# Altium PCB TIDA_010057.PcbDoc (part 6 of 9)
Units mil, origin at the board's own origin, x right, y up, seen from the top; angles counter-clockwise.
Board outline 1771.65 x 3543.31 mil, 12 copper layers (Top Layer, GND1, Signal Layer 1, GND2, POWER1, POWER2, GND4, POWER3, GND6, Signal Layer 2, GND7, Bottom Layer), stack 62.79 mil thick; 593 components, 374 nets, 1805 pads, 1029 vias.
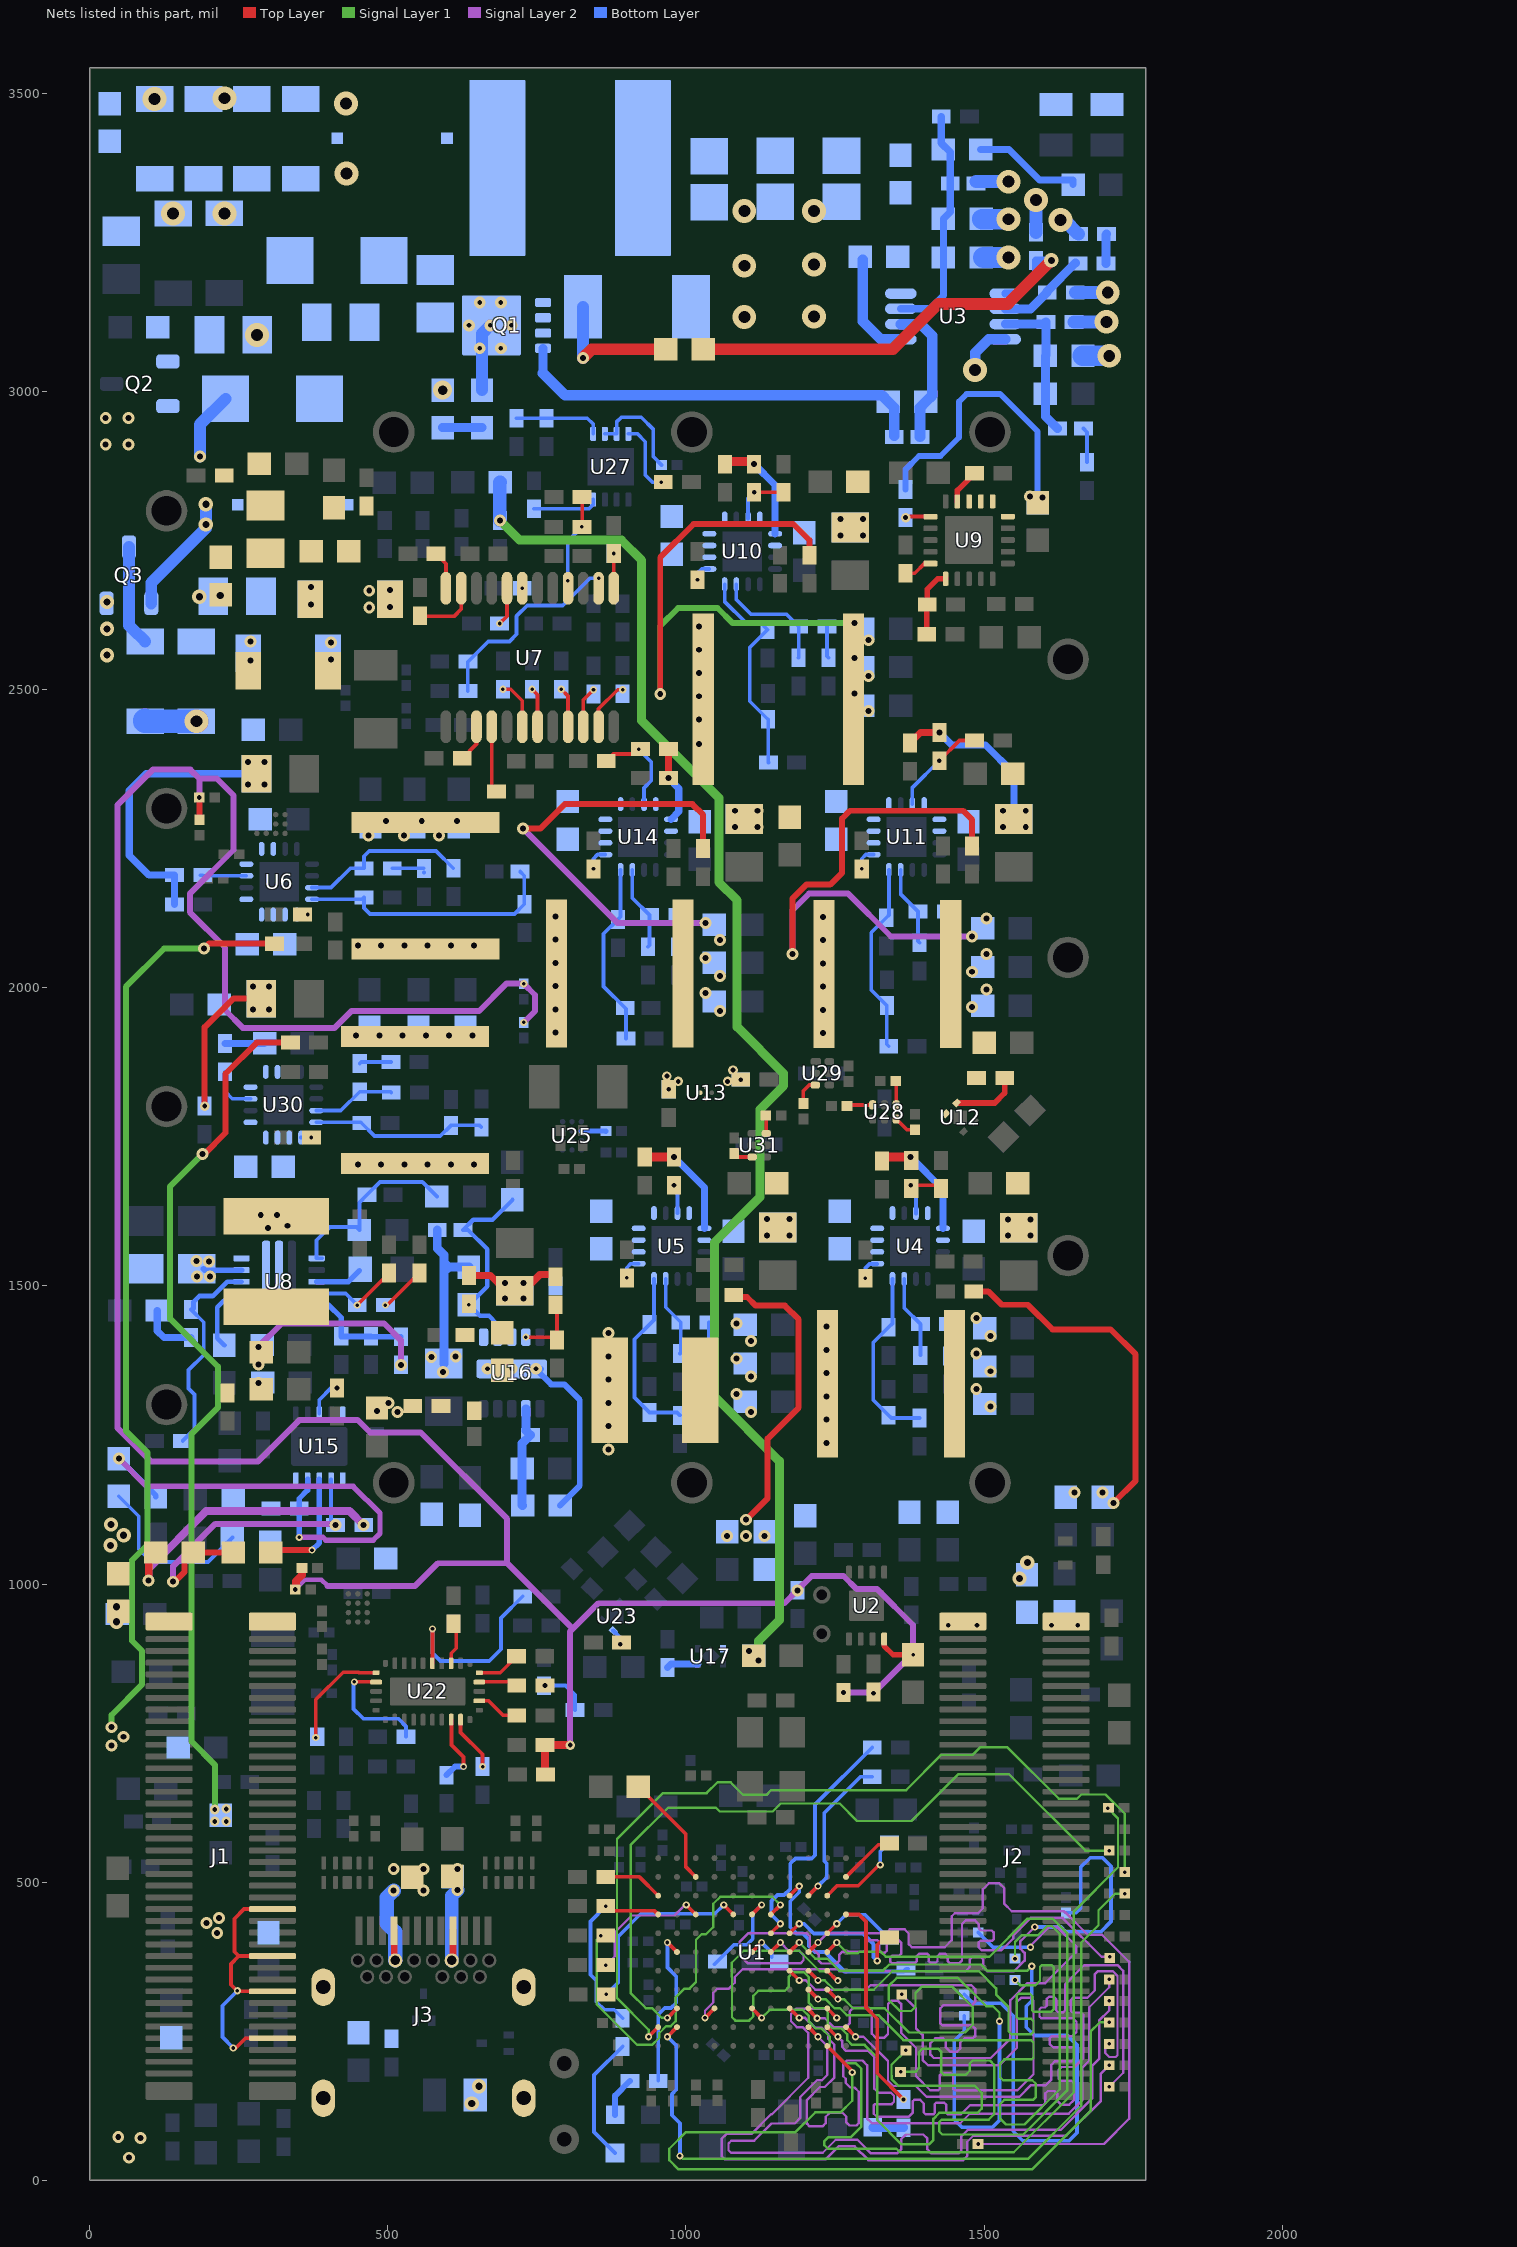
[diagram p14: the nets of this part, all layers, seen from the top]

## Via types
v1: diameter 12, hole 6, Top Layer to Bottom Layer, tented both sides, 424 vias
v2: diameter 20, hole 10, Top Layer to Bottom Layer, tented both sides, 401 vias
v3: diameter 16, hole 8, Top Layer to Bottom Layer, tented both sides, 96 vias
v4: diameter 24, hole 12, Top Layer to Bottom Layer, tented both sides, 28 vias
v5: diameter 20, hole 10, Top Layer to Bottom Layer, 28 vias
v6: diameter 40, hole 20, Top Layer to Bottom Layer, tented both sides, 23 vias
v7: diameter 19.68, hole 7.87, Top Layer to Bottom Layer, 17 vias
v8: diameter 19.68, hole 7.87, Top Layer to Bottom Layer, tented both sides, 10 vias
v9: diameter 32, hole 16, Top Layer to Bottom Layer, tented both sides, 1 vias
v10: diameter 13, hole 6, Top Layer to Bottom Layer, tented both sides, 1 vias

## Nets (pads, with @x,y where several pads share a name; then routed paths per layer and width w, separated by ;. In a path a pad name is that pad's centre, name@x,y a point inside that pad or via, vN(x,y) a via of type N, cw(c..) or ccw(c..) an arc to the next point about the centre after c; other vN are vias at no path point) (continued)
HVGND: C22.2 C23.2 C24.2 C26.1 C30.2 C31.2 C32.2 C33.2 C34.2 C36.1 C37.1 C42.2 C70.2 C71.1 C72.2 C161.2 C177.2 C200.2 C201.2 C208.1 C214.1 C232.2 C233.1 C241.2 C244.2 D5.2 D6.1 L3.1 L29.1 L44.1 R37.1 R39.1 R40.1 R41.1 R44.2 R45.1 R126.2 U3.4 U3.5 | length 859.7
  Bottom Layer w17.72: C26.1@1296.51,3221 1296.51,3117.99 1326.89,3087.61 U3.5@1360.41,3087.61 ; v6(1485,3036) 1485.41,3036.41 1485.41,3064.98 1508.05,3087.61 U3.4@1535.61,3087.61
  Bottom Layer w20: v2(185,2891) 185,2944.74 D6.1@228.26,2988
  Bottom Layer w22: D5.2@1486.68,3352 v6(1541,3352) ; C32.2@1587,3267.24 v6(1587,3321.56) ; v6(1628,3288) 1634.38,3288 R40.1@1658.38,3264 ; C33.2@1651.13,3117 v6(1705.45,3117) ; C177.2@1653.13,3166 v6(1707.45,3166)
  Bottom Layer w30: C42.2@1494.99,3290 C42.2@1495.99,3289
  Bottom Layer w35: C42.2@1496.99,3289 v6(1541,3289) ; R39.1@1498.99,3225 v6(1541,3225) ; R45.1@1666,3060 v6(1710.01,3060)
  Bottom Layer w40: C208.1@93,2447.07 C208.1@94.07,2447.07 ; C208.1@93,2448.14 C208.1@94.07,2447.07 ; v6(179,2447.07) C208.1@94.07,2447.07
  other v2: 405,2551 405,2579 469,2638 504,2639 469,2666 504,2667
  other v4: 641,129 653,158
  other v6: 281,3095 1098,3125 1215,3126 1098,3211 1215,3213 140,3298.86 226,3298.93 1098,3303 1215,3303 431,3366 430,3483 109,3490.93 226,3491.93
  other v9: 592,3002.5
HVM: C38.2 J1.79 J1.80 L43.2
  other v4: 45,937 45,962
HVP: C29.1 J2.79 J2.80 L42.2
  other v3: 1440,931 1488,931 1613,931 1657,931
I2C_1V8: C5.1 C123.2 L35.2 R12.2 R13.2 R177.1 R178.1 R185.2 R186.2 R232.2 R233.2 R236.2 R237.2 U2.8 | length 5007.6
  Top Layer w9: U2.8@1332.53,907.9 1332.53,896.47 1347.5,881.5 v1(1381,881.5)
  Top Layer w10: R185.2@184,2281.99 v3(184.02,2319)
  Top Layer w13: v3(345,991) 346,992 346,1005 356.02,1015.02 R236.2@356.02,1027 ; R178.1@764.62,681 763.62,682 R177.1@763.62,730 v3(806,730)
  Signal Layer 2 w8: v3(345,991) 361.2,1007.2 388.8,1007.2 399,997
  Signal Layer 2 w10: v3(184.02,2319) 184.02,2350.98 ; 399,997 546,997 584,1035 700.14,1035 ; v1(728,1941.98) 747,1960.98 747,1987.99 v1(728,2006.99) 698.99,2006.99 653,1961 439,1961 411,1933 256.8,1933 227,1962.8 227,2068 168,2127 168,2158 241.2,2231.2 241.2,2322.8 213.02,2350.98 184.02,2350.98 ; v3(806,730) 806,920.78 810.18,924.96 ; v3(1264.5,818.38) 1313.12,818.38 v3(1314.5,817) 1379,881.5 v1(1381,881.5) 1381,931.35 1320.85,991.5 1286.58,991.5 1264.37,1013.7 1211.08,1013.7 v2(1187,989.62) 1165.29,967.91 853.12,967.91 810.18,924.96 ; 184.02,2350.98 169,2366 106,2366 46.41,2306.41 46.41,1262.26 103.35,1205.33 282.01,1205.33 352.25,1275.56 449.2,1275.56 470.19,1254.58 555.03,1254.58 700.14,1109.46 700.14,1035 ; 700.14,1035 810.18,924.96
INT#: R238.2 U22.23 | length 121.9
  Top Layer w6.25: U22.23@606.37,772.76 606.95,772.18 606.95,730.05 627,710 v1(627,694)
  Bottom Layer w10: R238.2@598.31,679.63 612.68,694 v1(627,694)
NetC4_1: C4.1 U1.E10 | length 133.2
  Top Layer w6.25: U1.E10@1236.98,414.5 v1(1253,430.51)
  Bottom Layer w6.25: v1(1253,430.51) 1268,445.51 1300.49,445.51 1339,407 C4.1@1341.38,407
NetC22_1: C22.1 C23.1 C24.1 L1.1 R33.2 R54.2 R71.2
NetC25_1: C25.1 D3.2 L3.2
NetC25_2: C25.2 C35.2 L1.2 Q1.5 Q1.6 Q1.7 Q1.8 Q1.9 R35.2 | length 114.3
  Bottom Layer w20: R35.2@658,3002.5 658,3097.07 v7(671.93,3111)
  other v7: 654.12,3072.61 689.75,3072.61 636.3,3111 707.56,3111 654.12,3149.39 689.75,3149.39
NetC26_2: C26.2 R33.1 U3.8
NetC27_1: C27.1 C177.1 U3.2 | length 150.8
  Bottom Layer w15: U3.2@1535.61,3138.8 1578.32,3138.8 1605.52,3166 C177.1@1605.88,3166 1605.88,3168.13 C27.1@1653.38,3215.62
NetC27_2: C27.2 R40.2 | length 49.4
  Bottom Layer w15: C27.2@1704.62,3215 1704.62,3263 R40.2@1705.62,3264
NetC28_2: C28.2 R36.1 | length 184
  Bottom Layer w12: R36.1@1494.5,3406 1542,3406 1593.24,3354.76 1649.5,3354.76 C28.2@1649.5,3347
NetC30_1: C30.1 C31.1 C70.1 C232.1 D3.1 L2.1 R37.2
NetC32_1: C32.1 R38.1 U3.1 | length 760.9
  Top Layer w20: R38.1@1029.5,3071 1347.15,3071 1423.15,3147 1540,3147 v4(1613,3220)
  Bottom Layer w13: U3.1@1535.61,3164.39 1557.39,3164.39 1587,3194 C32.1@1587,3220 v4(1613,3220)
NetC33_1: C33.1 D18.1 R42.1 R45.2 U3.3 | length 257.6
  Bottom Layer w15: U3.3@1535.61,3113.2 1600.09,3113.2 C33.1@1603.88,3117 1603.88,3060.87 R45.2@1603.01,3060 R42.1@1603.01,2996.39 1603.01,2958.34 D18.1@1623.35,2938
NetC34_1: C34.1 R35.1 | length 66
  Bottom Layer w15: C34.1@592,2939.5 R35.1@658,2939.5
NetC35_1: C35.1 D6.2 L4.2
NetC36_2: C36.2 C37.2 C71.2 C233.2 L4.1 L5.1 R44.1
  other v2: 270,2549 270,2581 371,2643 371,2672
NetC39_1: C39.1 U4.13
NetC39_2: C39.2 L6.1 U4.10 U4.11 U4.12
  other v2: 1236,1237 1236,1276 1236,1315 1236,1354 1236,1393 1236,1432
NetC41_1: C41.1 C43.1 C44.1 R46.1 R48.1 R49.1 U4.1 U4.2 U4.16 | length 191
  Top Layer w15: R46.1@1328,1716.13 v2(1377,1716.13)
  Bottom Layer w12: v2(1377,1716.13) 1431.12,1662.01 U4.1@1431.12,1596.53
  other v2: 1540,1584.5 1578,1584.5 1540,1611.5 1578,1611.5
NetC42_1: C42.1 D5.1 R36.2 R39.2 R245.2 U3.7 | length 391.7
  Bottom Layer w12: U3.7@1360.41,3138.8 1409.8,3138.8 1432,3161 R39.2@1432,3225 C42.1@1432,3290 1443.37,3301.37 1443.37,3401.63 1428.38,3416.62 R245.2@1428.38,3461
NetC45_1: C45.1 U4.9 | length 39.8
  Bottom Layer w6.25: v1(1301,1513) 1301,1530 1307.98,1536.98 U4.9@1320.88,1536.98
NetC46_1: C46.1 C47.1 C48.1 L6.2 L7.1 L8.1 L9.1 L10.1 R50.2 | length 580
  Top Layer w10: R50.2@1482.62,1491 1507,1491 1529.5,1468.5 1573.5,1468.5 1615,1427 1712.43,1427 1754.2,1385.23 1754.2,1173.2 v2(1717,1136)
  other v2: 1652,1154 1699,1154 1511,1298 1487,1327 1511,1357 1487,1387 1511,1416 1487,1446
NetC50_1: C50.1 R52.2 U4.7 | length 139.7
  Bottom Layer w6.25: U4.7@1366.16,1511.88 1366.16,1463.22 R52.2@1393.38,1436 1393.38,1384 C50.1@1393,1383.62
NetC51_1: C51.1 R52.1 | length 54.4
  Bottom Layer w6.25: R52.1@1440.62,1436 1443,1433.62 C51.1@1443,1382.62
NetC54_1: C54.1 U5.13
NetC54_2: C54.2 L17.1 U5.10 U5.11 U5.12
  other v2: 870.51,1226 870.51,1265 870.51,1304 870.51,1343 870.51,1382 870.51,1421
NetC56_1: C56.1 C57.1 C58.1 R53.1 R55.1 R56.1 U5.1 U5.2 U5.16 | length 189.8
  Top Layer w15: R53.1@931,1716.13 v2(980,1716.13)
  Bottom Layer w12: v2(980,1716.13) 1031.12,1665.01 U5.1@1031.12,1596.53
  other v2: 1136,1585 1174,1585 1136,1612 1174,1612
NetC59_1: C59.1 U6.13
NetC59_2: C59.2 L11.1 U6.10 U6.11 U6.12
  other v2: 450,2071 489,2071 528,2071 567,2071 606,2071 645,2071
NetC60_2: C60.2 D14.1 R119.1 U6.8 | length 443.7
  Bottom Layer w6.25: U6.8@373.12,2148.47 457.02,2148.47 R119.1@460.32,2151.77 460.32,2133.68 470,2124 712.76,2124 C60.2@729,2140.24 729,2188 D14.1@722,2195
NetC61_1: C61.1 C67.1 C68.1 L11.2 L30.2 R74.2 | length 1575
  Top Layer w10: v2(192,2066) 200,2074 R74.2@310,2074
  Signal Layer 1 w10: v2(37,760) 37,780.57 88.2,831.77 88.2,887.8 71,905 71,1040 97,1066 97,1221 60.8,1257.2 60.8,2001.8 125,2066 v2(192,2066)
  other v2: 37,729 57,744 468,2255.5 527,2255.5 586,2255.5 497,2279.5 557,2279.5 616,2279.5
NetC62_1: C62.1 C63.1 C64.1 R66.1 R69.1 R72.1 U6.1 U6.2 U6.16 | length 472.7
  Bottom Layer w12: R66.1@142.38,2140 R69.1@142.38,2189 99.65,2189 66.49,2222.16 66.49,2331.15 94.35,2359 C63.1@280,2359
  other v2: 266,2341 293,2341 266,2379 293,2379
NetC65_2: C65.2 D15.1 R132.1 U30.8 | length 295
  Bottom Layer w6.25: U30.8@380.12,1774.47 454.91,1774.47 R132.1@456.38,1773 477.81,1751.56 588.22,1751.56 D15.1@606,1769.35 654.03,1769.35 C65.2@657,1766.38
NetC66_1: C66.1 U6.9 | length 18.5
  Bottom Layer w6.25: U6.9@347.53,2122.88 365.88,2122.88 v1(366,2123)
NetC69_2: C69.2 D16.1 R100.1 U10.8 | length 369.1
  Bottom Layer w6.25: U10.8@1064.98,2676.88 1064.98,2648.02 1100,2613 1124.62,2613 R100.1@1137,2600.62 1107,2570.62 1107,2480.5 1137.15,2450.35 D16.1@1138,2450.35 1138,2378.38 C69.2@1138.38,2378
NetC72_1: C72.1 Q3.1 R201.2 | length 204.2
  Bottom Layer w20: Q3.1@103.4,2644.76 103.4,2679.4 195,2771 v4(195,2811)
  other v4: 195,2777
NetC75_1: C75.1 R121.2 U6.7 | length 286.3
  Bottom Layer w6.25: U6.7@373.12,2168.16 404.9,2168.16 437.12,2200.38 R121.2@460.32,2200.38 460.32,2220.82 469,2229.5 581,2229.5 C75.1@610,2200.5
NetC76_1: C76.1 R121.1 | length 53.2
  Bottom Layer w6.25: R121.1@507.57,2200.38 C76.1@560.24,2200.38 ; C76.1@560.62,2193.38 C76.1@561,2193
NetC77_1: C77.1 R68.2 U27.1 | length 148.9
  Bottom Layer w6.25: R68.2@716,2955.24 C77.1@766,2955.24 834.76,2955.24 844.47,2945.53 U27.1@844.47,2929.12
NetC78_1: C78.1 U27.2 U27.3 | length 178
  Bottom Layer w6.25: U27.2@864.16,2929.12 U27.3@883.84,2929.12 883.84,2948.84 892,2957 925,2957 945.45,2936.55 945.45,2890.56 C78.1@959.01,2877
NetC79_1: C79.1 U30.13
NetC79_2: C79.2 L27.1 U30.10 U30.11 U30.12
  other v2: 450,1704 489,1704 528,1704 567,1704 606,1704 645,1704
NetC80_1: C80.1 U10.13
NetC80_2: C80.2 L13.1 U10.10 U10.11 U10.12
  other v2: 1022,2409 1021.8,2450 1021.8,2489 1021.8,2528 1021.8,2567 1021.8,2606
NetC81_1: C81.1 C82.1 C86.1 R91.1 R94.1 R96.1 U10.1 U10.2 U10.16 | length 180.3
  Top Layer w15: R91.1@1065.5,2883 R94.1@1114.5,2883
  Bottom Layer w12: v2(1114.5,2878.24) 1149.62,2843.12 U10.1@1149.62,2761.53
  other v2: 1259.01,2759 1297.01,2759 1259.01,2786 1297.01,2786
NetC83_1: C83.1 C84.1 C88.1 C89.1 C90.1 L13.2 R97.2 R99.2 U9.5 U9.6 U9.7 U9.8 | length 1489.3
  Top Layer w10: v2(957,2493) 957,2722 1013,2778 1180,2778 1207,2751 R97.2@1207,2725.62
  Signal Layer 1 w10: v2(957,2493) 957,2607 987,2637 1053,2637 1078,2612 v2(1282.51,2612)
  Bottom Layer w10: R99.2@1368.5,2835.87 1368.5,2869.5 1391,2892 1427,2892 1458,2923 1458,2983 1471,2996 1527,2996 1590,2933 C83.1@1590,2813.5
  other v2: 1306.51,2464 1282.51,2494 1306.51,2523 1282.51,2553 1306.51,2583 1598,2822 1577,2824
NetC87_1: C87.1 U10.9 | length 33.9
  Bottom Layer w6.25: v1(1019.5,2684.38) 1019.5,2695.5 1026.48,2702.47 U10.9@1039.39,2702.47
NetC94_1: C94.1 U5.9 | length 39.8
  Bottom Layer w6.25: v1(901,1513.5) 901,1530.5 907.98,1537.47 U5.9@920.88,1537.47
NetC96_1: C96.1 C97.1 C98.1 L12.1 L17.2 L18.1 L23.1 L35.1 R57.2 | length 500.2
  Top Layer w10: R57.2@1080.24,1485 1080.24,1481.5 1102.5,1481.5 1117,1467 1166,1467 1189,1444 1189,1296 1137,1244 1137,1144 v2(1101,1108)
  other v2: 214,415 196,432 217,440 1069.27,1081 1101,1081 1132,1081 1109.01,1289 1085.01,1319 1109.01,1348 1085.01,1378 1109.01,1408 1085.01,1437
NetC100_1: C100.1 R59.2 U5.7 | length 136.3
  Bottom Layer w6.25: U5.7@966.16,1511.88 966.16,1464.22 R59.2@991.38,1439 991.38,1388 C100.1@990,1386.62
NetC101_1: C101.1 R59.1 | length 53.8
  Bottom Layer w6.25: R59.1@1038.62,1439 1038.62,1390 C101.1@1042,1386.62
NetC102_1: C102.1 U11.13
NetC102_2: C102.2 L24.1 U11.10 U11.11 U11.12
  other v2: 1230,1924 1230,1963 1230,2002 1230,2041 1230,2080 1230,2119
NetC103_1: C103.1 C104.1 C105.1 R62.1 R64.1 R65.1 U11.1 U11.2 U11.16 | length 286.6
  Top Layer w12: R62.1@1376,2410.62 1393.62,2428.24 v2(1425,2428.24)
  Bottom Layer w12: v2(1425,2428.24) 1445.75,2407.5 1502.49,2407.5 1550,2359.99 C104.1@1550,2283
  other v2: 1532,2270 1570,2270 1532,2297 1570,2297
NetC106_1: C106.1 U11.9 | length 39.8
  Bottom Layer w6.25: v1(1295,2199.5) 1295,2216.5 1301.98,2223.47 U11.9@1314.88,2223.47
NetC107_1: C107.1 U9.15 | length 46.3
  Top Layer w6.25: C107.1@1370.5,2695.38 1383.88,2695.38 1400.13,2711.63 U9.15@1410.04,2711.63
NetC110_1: C110.1 C111.1 C113.1 C224.1 L24.2 R104.2 R113.2 U12.4 | length 974.1
  Top Layer w10: v2(1179,2057) 1179,2150 1202,2173 1242,2173 1262,2193 1262,2284 1275,2297 1465,2297 1480,2282 R104.2@1480,2238
  Signal Layer 2 w10: v2(1179,2057) 1179,2130.52 1206.48,2158 1272,2158 1344,2086 v2(1480.01,2086)
  other v2: 1480.01,1968 1504.01,1997 1480.01,2027 1504.01,2057 1504.01,2116
NetC114_1: C114.1 R107.2 U11.7 | length 135.4
  Bottom Layer w6.25: U11.7@1360.16,2197.88 1360.16,2157.22 R107.2@1389.38,2128 1389.38,2078.24 C114.1@1392,2075.62
NetC116_1: C116.1 L19.2 U8.7@317.67,1507
  other v2: 299,1597 332,1601 287,1619 314,1619
NetC116_2: C116.2 U8.13
NetC117_1: C117.1 C118.1 L19.1 R134.1 R135.2 U8.12 | length 166.1
  Bottom Layer w6.25: R135.2@170,1413.38 R135.2@174.17,1409.21
  Bottom Layer w9.4: C117.1@191,1529 193.32,1526.68 U8.12@254.68,1526.68
  Bottom Layer w12: R134.1@113.5,1459 113.5,1424.5 124.62,1413.38 R135.2@170,1413.38
  other v2: 180,1516 202,1516 200,1541 179,1542
NetC119_1: C119.1 U8.10 | length 118.8
  Bottom Layer w8: C119.1@226,1400.5 214,1412.5 214,1464 237.31,1487.31 U8.10@254.68,1487.31
NetC120_1: C120.1 C134.1 C137.1 C171.1 R136.1 R138.2 U8.8@296.02,1507 | length 308
  Signal Layer 2 w10: v2(283,1398) 322,1437 494,1437 522,1409 v2(522,1367.76)
  other v2: 283,1337 283,1368
NetC121_1: C121.1 C179.2 C191.1 L28.1 R140.2 U15.10 | length 285.8
  Bottom Layer w6.25: R140.2@49,1147.5 82.52,1113.98 82.52,1058.48 104,1037 198.5,1037 C191.1@239.5,1078
NetC129_1: C129.1 J3.S1 J3.S2 J3.S3 J3.S4 L21.1
NetC130_2: C130.2 R162.1 R171.1 | length 82
  Bottom Layer w6.25: v3(763.62,830) 798,830 814,814 R162.1@814,789
NetC132_1: C132.1 C135.1 C219.1 C220.1 C221.1 L25.2 R114.2 U13.A1 U13.B1 | length 754.4
  Top Layer w10: v2(727,2266.99) 755.99,2266.99 797.12,2308.12 1010.88,2308.12 1029,2290 R114.2@1029,2233.62
  Signal Layer 2 w10: v2(727,2266.99) 884.99,2109 v2(1033.01,2109)
  other v2: 1057.01,1961 1033.01,1991 1057.01,2020 1033.01,2050 1057.01,2080
  other v3: 971.26,1830 987.26,1843.01 968.26,1852.01
NetC157_1: C157.1 C158.1 C159.1 R124.1 R127.1 R128.1 U30.1 U30.2 U30.16 | length 313.9
  Top Layer w10: v3(193,1801.62) 193,1934 241,1982 C157.1@288,1982
  Bottom Layer w10: C159.1@293.13,1906.62 C159.1@293.5,1907
  Bottom Layer w12: R127.1@227,1906.62 C159.1@293.13,1906.62
  other v2: 274,1964 301,1964 274,2002 301,2002
NetC160_1: C160.1 U30.9 | length 17.5
  Bottom Layer w6.25: U30.9@354.53,1748.88 371.88,1748.88 v1(372,1749)
NetC164_1: C164.1 C234.1 C235.1 L32.1 U17.1 | length 2403.6
  Signal Layer 1 w15: v2(688,2784) 720.65,2751.35 859.65,2751.35 860,2751 892,2751 925.9,2717.1 925.9,2448.1 1055.3,2318.7 1055.3,2177.36 1085.8,2146.86 1085.8,1934.39 1163.96,1856.23 1163.96,1835.77 1124,1795.81 1124,1649 1048,1573 1048,1315.08 1156.7,1206.38 1156.7,939.7 1122,905 v2(1122,872)
  Signal Layer 1 w20: v2(1106,888) v2(1122,872)
  Bottom Layer w23: v2(688,2784) 688,2847.5 L32.1@688.5,2848
NetC173_1: C173.1 R154.2 U7.4 | length 149.9
  Top Layer w6.25: v1(825.62,2773) 826,2773.38 R154.2@826,2823
  Bottom Layer w6.25: v1(802,2683) 802,2749.38 v1(825.62,2773)
NetC175_1: C175.1 R107.1 | length 54.2
  Bottom Layer w6.25: R107.1@1436.62,2128 1436.62,2080 C175.1@1441,2075.62
NetC176_1: C176.1 U14.13
NetC176_2: C176.2 L25.1 U14.10 U14.11 U14.12
  other v2: 781,1925 781,1964 781,2003 781,2042 781,2081 781,2120
NetC179_1: C179.1 R137.1 R140.1 U15.9 | length 845.6
  Signal Layer 2 w9: v2(49,1210.5) 95.5,1164 442,1164 487,1119 487,1085 475.7,1073.7 396,1073.7 391,1078.7 351.94,1078.7 v1(351.62,1078.38)
  Bottom Layer w9: v2(49,1210.5) 111,1148.5 R137.1@111,1146.5 ; v1@352,1078 v1(351.62,1078.38) C179.1@351.62,1127 351.62,1143.62 365.63,1157.63 U15.9@365.63,1175.76
NetC181_1: C181.1 C189.1 R242.2 U15.5
  other v2: 516,1289 482,1290 501,1304
NetC182_2: C182.2 R138.1 R142.2 U8.5 | length 181.5
  Bottom Layer w9: U8.5@380.66,1467.63 401.37,1467.63 422,1447 R142.2@422,1415.62 ; C182.2@472,1415.62 472.62,1415 R138.1@522,1415
  Bottom Layer w10: R142.2@422,1415.62 C182.2@472,1415.62
NetC183_1: C183.1 R164.2 U8.4 | length 151.9
  Top Layer w6.25: v1(448.76,1468) 502,1521.24 C183.1@502,1521.76
  Bottom Layer w6.25: U8.4@380.66,1487.32 429.44,1487.32 v1(448.76,1468)
NetC184_1: C184.1 R164.1 | length 79.3
  Top Layer w6.25: v1(496,1468) 499.24,1468 C184.1@553,1521.76
NetC186_1: C186.1 R190.1 R239.2 U16.7 | length 171.2
  Bottom Layer w15: R239.2@726.01,1132 725.5,1132.5 R190.1@725.5,1194 725.5,1236.13 C186.1@739.38,1250 731.62,1257.76 U16.7@731.62,1294.07
NetC187_1: C187.1 C188.1 C193.1 R67.2 R181.2 R188.2 R191.1 U16.3 | length 186.8
  Top Layer w12: R188.2@636,1517.62 672.38,1517.62 698,1492 C187.1@713,1492 728,1492 755,1519 777.62,1519 R191.1@781,1515.62
  Bottom Layer w12: C193.1@712,1483 723,1494 C193.1@726,1494
  other v2: 697,1479 728,1479 697,1505 728,1505
NetC188_2: C188.2 C194.2 D7.2 D8.2 R239.1 R241.1 R242.1 U16.1 U16.11@708,1361 | length 579.6
  Bottom Layer w10: U16.11@757,1361 v7(748.55,1361) 748.55,1360.45 774,1335 796,1335 822,1309 822,1165 R239.1@789,1132
  Bottom Layer w15: D8.2@583,1594 583,1563 594,1552 594,1539.5 ; C194.2@594,1370 594,1523.5 ; R241.1@636,1531.5 602,1531.5 ; 594,1523.5 594,1539.5 ; 594,1523.5 602,1531.5 ; 594,1539.5 602,1531.5
  other v2: 593,1356 573,1381 614,1382
  other v7: 667.45,1361 708,1361
NetC190_1: C190.1 R163.2 R195.2 U15.7 | length 540.3
  Top Layer w10: v2(140,1004) 143,1004 159,1020 159,1038 R195.2@174,1053 R163.2@241.01,1053
  Signal Layer 2 w10: v2(140,1004) 140,1030 211,1101 410.38,1101 v2(412.38,1099)
  Bottom Layer w6.25: U15.7@405,1175.76 405,1106.38 v2(412.38,1099)
NetC190_2: C190.2 C195.2 C207.1 L34.2 R195.1 U15.6 | length 482.5
  Top Layer w13: v2(99,1006) 99,1040.99 R195.1@111.01,1053
  Signal Layer 2 w13: v2(99,1006) 99,1026 195.7,1122.7 435.92,1122.7 v2(459.62,1099)
NetC192_2: C192.2 U15.3 | length 61.2
  Bottom Layer w6.25: U15.3@385.32,1286 385.32,1309.32 405,1329 v3(415,1329)
NetC196_1: C196.1 C197.1 C215.1 R108.1 R110.1 R112.1 U14.1 U14.2 U14.16 | length 130.8
  Top Layer w12: v2(970.66,2351.93) 970.66,2400.17 R110.1@971.02,2400.53
  Bottom Layer w12: v2(970.66,2351.93) 988.15,2334.44 988.15,2295.56 U14.1@975.12,2282.53
  other v2: 1082,2270 1120,2270 1082,2297 1120,2297
NetC198_1: C198.1 C199.1 L41.2 U13.A2
  other v2: 66,38 85,71 48,73
  other v3: 1070,1843 1092.01,1846 1079,1862
NetC206_1: C206.1 D8.1 R188.1 R241.2 U16.2 | length 347.2
  Bottom Layer w7: U16.2@684.38,1414.15 684.38,1435.62 670,1450 654.5,1450 v1(636,1468.5) 667,1499.5 667,1561.65 634.65,1594 D8.1@626.31,1594 643.31,1611 675.5,1611 C206.1@709,1644.5
NetC208_2: C208.2 C214.2 L5.2 Q3.3 R201.1 | length 169.5
  Bottom Layer w20: Q3.3@66,2739.24 66,2737.24 66,2607.93 72.2,2601.73 C208.2@93,2580.93
  other v4: 184,2656 219,2658
NetC216_1: C216.1 U14.9 | length 39.8
  Bottom Layer w6.25: v1(845,2199.5) 845,2216.5 851.98,2223.47 U14.9@864.88,2223.47
NetC217_1: C217.1 C218.1 J3.A4 J3.A9 J3.B4 J3.B9 L20.2 | length 350.8
  Top Layer w11.3: J3.B9@510.79,370.9 J3.A4@510.79,418.54
  Top Layer w12: J3.B9@510.79,370.9 J3.B9@512.76,368.93 ; J3.B4@607.24,368.93 609.21,370.9 J3.A9@609.21,418.54
  Bottom Layer w23: J3.B4@607.24,368.93 607.24,477.24 v2(617,487)
  Bottom Layer w24: v2(510,486) 498.4,474.4 498.4,431.09 512.76,416.73 J3.B9@512.76,368.93
  other v2: 560,486 510,522 560,522 617,522
NetC222_1: C222.1 R118.2 U14.7 | length 141.8
  Bottom Layer w6.25: U14.7@910.16,2197.88 910.16,2150.84 R118.2@939,2122 939,2071.38 C222.1@936.62,2069
NetC223_1: C223.1 R118.1 | length 53.2
  Bottom Layer w6.25: C223.1@986.24,2069.38 R118.1@986.24,2122 ; C223.1@987.62,2069.38 C223.1@988,2069
NetC225_1: C225.1 R101.2 U10.7 | length 201.9
  Bottom Layer w6.25: U10.7@1084.66,2676.88 1084.66,2650.79 1109,2626.45 1168.93,2626.45 R101.2@1189.38,2606 1189.38,2554 C225.1@1189,2553.62
NetC226_1: C226.1 R101.1 | length 53.4
  Bottom Layer w6.25: R101.1@1236.62,2606 1236.62,2556 C226.1@1239,2553.62
NetC227_1: C227.1 C228.1 C229.1 L27.2 L31.2 R129.2 | length 1472.1
  Top Layer w10: v2(189,1721) 192,1721 228,1757 228,1856 280,1908 R129.2@336.76,1908
  Signal Layer 1 w10: v2(189,1721) 135,1667 135,1445 215,1365 215,1296 171,1252 171,736 210,697 v3(210,622)
  other v2: 447,1920 486,1920 525,1920 564,1920 603,1920 642,1920
  other v3: 210,602 229,602 229,623
NetC230_1: C230.1 R133.2 U30.7 | length 139.6
  Bottom Layer w6.25: U30.7@380.12,1794.16 421.31,1794.16 R133.2@453,1825.85 504.62,1825.85 C230.1@506,1824.47
NetC231_1: C231.1 R133.1 | length 53.4
  Bottom Layer w6.25: R133.1@453,1873.09 455.38,1875.47 C231.1@505.38,1875.47
NetC237_2: C237.2 D10.1 R106.1 U11.8 | length 320.3
  Bottom Layer w6.25: C237.2@1340.38,1902 1337,1905.38 D10.1@1337,1970.35 1311,1996.35 1311,2092.62 R106.1@1336,2117.62 1340.47,2122.09 U11.8@1340.47,2197.88
NetC238_2: C238.2 D11.1 R116.1 U14.8 | length 310.2
  Bottom Layer w6.25: U14.8@890.47,2197.88 890.47,2119.09 R116.1@886,2114.62 862,2090.62 862,2002.35 D11.1@898.35,1966 899.38,1964.97 C238.2@899.38,1915
NetC239_2: C239.2 D12.1 R60.1 U4.8 | length 306.7
  Bottom Layer w6.25: U4.8@1346.47,1511.88 1346.47,1437.09 R60.1@1340,1430.62 1314,1404.62 1314,1309.35 D12.1@1340,1283.35 1344.72,1278.62 C239.2@1392,1278.62
NetC240_2: C240.2 D13.1 R61.1 U5.8 | length 300.8
  Bottom Layer w6.25: U5.8@946.47,1511.88 946.47,1443.09 R61.1@939,1435.62 914,1410.62 914,1313 D13.1@939,1288 985,1288 C240.2@990,1283
NetC241_1: C241.1 Q2.1 R200.2
NetC243_1: C243.1 D17.1 R139.1 U8.1 | length 323.6
  Bottom Layer w6.25: U8.1@390.37,1546.37 U8.1@380.66,1546.37 380.66,1576.66 403,1599 447.5,1599 R139.1@452.5,1594 452.5,1640.16 D17.1@465.35,1653 486.78,1674.44 558.07,1674.44 C243.1@582.5,1650
NetD1_1: D1.1 R14.2 | length 67.3
  Bottom Layer w10: D1.1@881.47,110 881.47,142.09 R14.2@906.38,167
NetD2_1: D2.1 R26.2 | length 51.7
  Bottom Layer w15: D2.1@1313.53,89 1364.38,89 R26.2@1365,88.38
NetD4_1: D4.1 R34.1 U3.6 | length 238.9
  Bottom Layer w17.72: U3.6@1360.41,3113.2 1393.59,3113.2 1413,3093.8 1413,2993.5 R34.1@1402.5,2983 1392.65,2973.16 D4.1@1392.65,2924
NetD4_2: D4.2 Q1.4 R34.2 | length 701.9
  Bottom Layer w15: 760.42,3030.58 Q1.4@760.42,3072.61
  Bottom Layer w17.72: 760.42,3030.58 797.32,2993.68 1328.82,2993.68 R34.2@1339.5,2983 1349.35,2973.16 D4.2@1349.35,2926
NetD9_1: D9.1 R43.2 | length 213.1
  Bottom Layer w6.25: D9.1@880.94,46 846,80.94 846,176.76 R43.2@894,224.76
NetD18_2: D18.2 R123.2 | length 59.1
  Bottom Layer w6.25: D18.2@1666.65,2938 1672.88,2931.77 R123.2@1672.88,2881.46
NetJ1_10: J1.10 J1.18 J1.24 J1.32 | length 502.7
  Top Layer w6.25: v1@245,222 261.42,238.42 J1.10@306.6,238.42 ; J1.18@306.6,317.16 247.84,317.16 237,328 237,363 250.21,376.21 ; J1.24@306.6,376.21 250.21,376.21 ; J1.32@306.6,454.95 259,454.95 243,438.95 243,383.43 250.21,376.21
  Bottom Layer w6.25: v1(241,222) 222.67,240.33 222.67,292.99 v1(247.84,318.16)
NetL42_1: L42.1 Q2.2
  other v2: 27,2911 65,2911 27,2955.93 65,2955.93
  other v4: 1559.65,1009.54 1572.7,1036.39
NetL43_1: L43.1 Q3.2
  other v4: 35,1065 57,1082 36,1100 29,2558 29,2602 29,2647
NetQ1_1: Q1.1 Q1.2 Q1.3 R38.2 R41.2 | length 230.6
  Top Layer w20: v2(827.45,3056.45) 842,3071 R38.2@966.5,3071
  Bottom Layer w20: v2(827.45,3056.45) R41.2@827.45,3142
NetR1_2: R1.2 U1.E7 | length 416.9
  Top Layer w6.25: U1.E7@1142.5,414.5 v1(1158.51,430.51)
  Bottom Layer w6.25: v1(1158.51,430.51) 1143.51,445.51 1143.51,468.51 1153.5,478.5 1164.73,478.5 1175.01,488.79 1175.01,531.21 1183.79,540 1211.15,540 1216.57,545.43 1216.57,630.2 R1.2@1312.38,726
NetR2_2: R2.2 U1.C10 | length 157.6
  Top Layer w6.25: U1.C10@1236.98,477.49 1253.5,494 1289,494 1326,531 v1(1326,529)
  Bottom Layer w6.25: v1(1326,529) 1326,551.62 R2.2@1341.38,567
NetR3_2: R3.2 U1.F6 | length 54.7
  Top Layer w7: U1.F6@1111,383 v1(1127.02,399.02)
  Bottom Layer w6.25: v1(1127.02,399.02) 1144,382.03 R3.2@1144,374
NetR4_2: R4.2 U1.B11 | length 98.3
  Top Layer w6.25: U1.B11@1268.48,508.98 1322.5,563 R4.2@1344.38,563
NetR5_2: R5.2 U1.E8 | length 244.9
  Top Layer w6.25: U1.E8@1173.99,414.5 v1(1190.01,430.51) ; v1(1321,368) 1321,395 1333,407 R5.2@1341.38,407
  Bottom Layer w6.25: v1(1190.01,430.51) 1198.17,430.51 1214.55,414.14 1259.27,414.14 1259.39,414.02 1271.8,414.02 1271.95,414.17 1296.05,414.17 1296.2,414.02 1296.98,414.02 1314.76,396.24 1314.76,374.24 v1(1321,368)
NetR6_2: R6.2 U1.C9 | length 258.8
  Top Layer w7: U1.C9@1205.49,477.49 v1(1221.5,493.5)
  Bottom Layer w6.25: v1(1221.5,493.5) 1236.43,508.43 1236.43,531.18 1232,535.61 1232,616 1293,677 R6.2@1312.38,677
NetR7_1: R7.1 U1.C8 | length 333.2
  Top Layer w6.25: U1.C8@1173.99,477.49 v1(1190.01,493.5)
  Bottom Layer w6.25: v1(1190.01,493.5) 1190.01,483.22 1175.01,468.22 1175.01,424.4 1185.47,413.94 1196.19,413.94 1206.58,403.55 1206.58,392.83 1216.41,383 1233.49,383 1266,350.49 1364.87,350.49 R7.1@1369.38,355 ; R7.1@1370.88,353.5 R7.1@1372.38,355
NetR9_2: R9.2 U1.B3 | length 190.8
  Top Layer w6.25: R9.2@920.5,660 1000,580.5 1000,525.5 U1.B3@1016.51,508.98
NetR10_2: R10.2 U1.D7 | length 677.5
  Top Layer w6.25: U1.D7@1142.5,445.99 v1(1158.51,462.01)
  Signal Layer 1 w4: v1(857,410) 850.42,403.42 850.42,295.08 918.3,227.2 943.22,227.2 955.2,239.18 955.2,246.72 967.18,258.7 974.72,258.7 982.8,266.78 982.8,306.8 997.69,321.69 1006.21,321.69 1017,332.48 1017,403.54 1026.28,412.82 1033.81,412.82 1045.79,424.8 1045.79,463.83 1057.77,475.81 1144.71,475.81 v1(1158.51,462.01)
NetR11_2: R11.2 U1.D6 | length 167.5
  Top Layer w6.25: U1.D6@1111,445.99 v1(1127.02,462.01)
  Bottom Layer w6.25: R11.2@1048,362.42 1080.58,395 1102,395 1112.02,405.02 1112.02,447.01 v1(1127.02,462.01)
NetR14_1: R14.1 U1.F2 | length 279.7
  Top Layer w6.25: v1(969,399.02) U1.F2@985.02,383
  Bottom Layer w6.25: R14.1@953.62,167 953.62,278.23 964.46,289.07 975.18,289.07 984,297.88 984,342 969,357 v1(969,399.02)
NetR15_1: R15.1 R43.1 U1.D1 | length 324.4
  Top Layer w6.25: v1(865.62,460) 873.62,452 947.51,452 U1.D1@953.52,445.99
  Bottom Layer w6.25: v1(865.62,460) 840,434.38 840,345 849.62,335.38 849.62,299.72 863.35,286 880,286 R43.1@894,272
NetR16_1: R16.1 U1.D3 | length 222.6
  Top Layer w6.25: v1(1000.5,462.01) U1.D3@1016.51,445.99
  Signal Layer 2 w4: v1(865.62,361) 880.6,375.98 880.6,415.6 909.31,444.31 980.92,444.31 998.62,462.01 v1(1000.5,462.01)
NetR17_1: R17.1 U1.D5 | length 326.9
  Top Layer w6.25: v1(1063.49,462.01) U1.D5@1079.5,445.99
  Bottom Layer w6.25: v1(866.62,312) 886.78,332.15 886.78,409.47 924.31,447.01 1048.49,447.01 v1(1063.49,462.01)
NetR24_1: R24.1 U1.C1 | length 101
  Top Layer w6.25: R24.1@865.62,509 922.01,509 U1.C1@953.52,477.49
NetR25_1: R25.1 U17.3 | length 53.4
  Bottom Layer w12: R25.1@969,860.38 974.83,866.2 U17.3@1019.94,866.2
NetR26_1: R26.1 U1.D11 | length 363.1
  Top Layer w6.25: U1.D11@1268.48,445.99 1290.23,445.99 1302.13,434.1 1302.13,289.87 1321,271 1321,179.62 v1(1365,135.62)
NetR47_2: R47.2 R48.2 U4.15 | length 101.9
  Top Layer w6.25: v3(1377,1668.88) R47.2@1428,1668.88
  Bottom Layer w6.25: v3(1377,1668.88) 1385.84,1660.04 U4.15@1385.84,1622.12 U4.15@1385.84,1621.62
NetR55_2: R55.2 U5.15 | length 49.2
  Bottom Layer w6.25: v3(980,1668.88) 985.84,1663.04 U5.15@985.84,1622.12
NetR63_2: R63.2 R64.2 U11.15 | length 164.7
  Top Layer w6.25: v3(1425,2381) 1459,2415 R63.2@1484,2415
  Bottom Layer w6.25: U11.15@1379.84,2308.12 1379.84,2335.84 v3(1425,2381)
NetR69_2: R69.2 U6.15 | length 77.2
  Bottom Layer w6.25: R69.2@186.14,2189 R69.2@189.62,2189 190.78,2187.84 U6.15@262.88,2187.84
NetR70_1: R70.1 U27.8 | length 110.8
  Bottom Layer w6.25: R70.1@745,2803.38 837.38,2803.38 844.47,2810.47 U27.8@844.47,2818.88
NetR73_2: R73.2 U27.4 | length 121.9
  Bottom Layer w6.25: U27.4@903.53,2929.12 918.88,2929.12 932,2916 932,2860 944,2848 v1(959,2848)
NetR75_1: R75.1 R80.1 U7.1 | length 58.3
  Top Layer w6.25: v1(879,2728.38) 879.13,2728.25 U7.1@879.13,2670.14
NetR79_1: R79.1 R81.2 U7.2 | length 360.7
  Top Layer w6.25: U7.2@853.54,2670.14 v1(853.54,2687)
  Bottom Layer w6.25: R79.1@634.38,2498 634.38,2546.76 R81.2@634.62,2547 668.62,2581 704,2581 716,2593 716,2623.41 733.82,2641.23 793.44,2641.23 839.21,2687 v1(853.54,2687)
NetR82_2: R82.2 U7.11 | length 130.3
  Top Layer w6.25: R82.2@554,2624 555,2623 611,2623 623.22,2635.22 U7.11@623.22,2670.14 U7.11@623.22,2690.78
NetR83_2: R83.2 U7.15 | length 62.7
  Top Layer w6.25: R83.2@625,2385 648.81,2408.81 U7.15@648.81,2437.86
NetR84_2: R84.2 U7.16 | length 112.2
  Top Layer w6.25: U7.16@674.4,2437.86 674.4,2336.98 R84.2@682.38,2329
NetR85_2: R85.2 U7.8 | length 64.3
  Top Layer w6.25: v1(687.62,2611) 699.99,2623.37 U7.8@699.99,2670.14
NetR86_2: R86.2 U7.7
  other v1: 725.58,2670.14
NetR87_2: R87.2 U7.18 | length 84.2
  Top Layer w6.25: v1(693,2500.76) 706.24,2500.76 725.58,2481.42 U7.18@725.58,2437.86
NetR88_2: R88.2 U7.19 | length 66.7
  Top Layer w6.25: v1(742,2500.76) 751.17,2491.58 U7.19@751.17,2437.86
NetR89_2: R89.2 U7.21 | length 67.6
  Top Layer w6.25: v1(791,2500.76) 802.35,2489.4 U7.21@802.35,2437.86
NetR90_1: R90.1 U22.24 | length 94.2
  Top Layer w6.25: U22.24@622.12,772.76 622.12,751.24 658.75,714.61 658.75,694 v1(659,694)
NetR92_2: R92.2 R94.2 U10.15 | length 97.6
  Top Layer w6.25: v3(1114.5,2831) R92.2@1164,2831
  Bottom Layer w6.25: U10.15@1104.35,2787.12 1104.35,2820.85 v3(1114.5,2831)
NetR93_1: R93.1 U9.9 | length 58.9
  Top Layer w9.2: U9.9@1455.32,2815.96 1455.32,2834.31 R93.1@1484,2863
NetR95_2: R95.2 U31.3 | length 30.6
  Top Layer w6.25: R95.2@1134.02,1786 1134.81,1785.2 U31.3@1134.81,1755.68
NetR99_1: R99.1 U9.11 | length 42.3
  Top Layer w6.25: v3(1368.5,2788.62) 1370.25,2790.37 U9.11@1410.04,2790.37
NetR102_2: R102.2 U31.6 | length 32.5
  Top Layer w6.25: R102.2@1081,1722 1086.69,1716.31 U31.6@1111.19,1716.31
NetR103_1: R103.1 R111.2 U9.16 | length 114.2
  Top Layer w9: R103.1@1403.88,2593 1403.88,2642 R111.2@1404.88,2643 1404.88,2668.88 1422.04,2686.04 U9.16@1435.63,2686.04
NetR109_2: R109.2 R110.2 U14.15 | length 170.9
  Top Layer w6.25: R109.2@866.6,2380.52 878.1,2392.02 915.27,2392.02 R110.2@923.78,2400.53
  Bottom Layer w6.25: v1(920.8,2399.91) 941.76,2378.95 941.76,2347.18 929.84,2335.27 U14.15@929.84,2308.12
NetR113_1: R113.1 U12.3 | length 112.8
  Top Layer w9.5: U12.3@1454.15,1806.94 1517.94,1806.94 1534.62,1823.62 R113.1@1534.62,1849
NetR117_1: R117.1 U1.F10 | length 1411.9
  Top Layer w6.25: U1.F10@1236.98,383 v1(1253,399.02)
  Signal Layer 1 w4: v1(1253,399.02) 1271.22,380.8 1288.72,380.8 1291.12,383.2 1327.3,383.2 1335.5,375 1509,375 1573,439 1615,439 1639.35,414.65 1639.35,150.5 1565.85,77 1430,77 1425,82 1425,98 1429,102 1508,102 1517,111 1517,194 1510,201 1481,201 1476,196 1476,184 1469,177 1433,177 1428,182 1428,216 1423,221 1397,221 1391,215 1391,188 1385,182 v1(1360.01,182)
NetR122_1: R122.1 U1.F9 | length 1267.1
  Top Layer w6.25: U1.F9@1205.49,383 v1(1221.5,399.02)
  Signal Layer 2 w4: v1(1221.5,399.02) 1236.7,414.22 1335.22,414.22 1342,421 1367,421 1373.42,414.58 1373.42,396.58 1379,391 1434,391 1446,403 1446,443 1451,448 1490,448 1498,456 1498,488 1508,498 1526,498 1534.2,489.8 1534.2,463.6 1546.4,451.4 1633.6,451.4 1635,450 1635.86,450 1673.86,412 1698,412 1743.41,366.59 1743.41,103.41 1701,61 v1(1489.99,61)
NetR125_1: R125.1 U1.F7 | length 1258.7
  Top Layer w6.25: U1.F7@1142.5,383 v1(1158.51,399.02)
  Signal Layer 2 w4: v1(1158.51,399.02) 1172.31,385.22 1189.95,385.22 1197.16,378 1197.16,369.16 1192,364 1104,364 1090,378 1090,400 1104.22,414.22 1203,414.22 1207.7,409.51 1207.7,393.3 1223,378 1223,368 1227.2,363.8 1252.8,363.8 1257,368 1257,378.2 1262,383.2 1298,383.2 1302.13,387.33 1302.13,398.13 1307.02,403.02 1321,403.02 1324,400.02 1324,386.5 1328.5,382 1334,382 1337,385 1337,399 1341,403 1357,403 1361,399 1361,380 1357.65,376.65 1345.65,376.65 1343,374 1343,366.79 1345.79,364 1384,364 1387,367 1387,375.8 1391,379.8 1405,379.8 1407,377.8 1407,368 1410,365 1419,365 1422,368 1422,375.8 1426,379.8 1435,379.8 1439,375.8 1439,368 1443,364 1458,364 1463,369 1463,430 1469,436 1485,436 1491,430 1491,423 1495,419 1513,419 1516,416 1516,404 1514,402 1494,402 1491,399 1491,391 1496.2,385.8 1529,385.8 1549.2,406 1549.2,411 1578.4,440.2 1631.8,440.2 1697,375 v1(1711,375)
NetR127_2: R127.2 U30.15 | length 81.3
  Bottom Layer w6.25: R127.2@227,1859.38 227,1826 239.16,1813.84 U30.15@269.88,1813.84
NetR130_1: R130.1 U1.G10 | length 1323.7
  Top Layer w6.25: U1.G10@1236.98,351.5 1253.49,335 v1(1255,335)
  Signal Layer 1 w4: 1237.8,278.79 1237.8,262 1245,254.8 1260.72,254.8 1270.7,244.82 1270.7,235.28 1278.78,227.2 1299.8,227.2 1321,206 1321,101.12 1361.72,60.4 1407.6,60.4 1415,67.8 1415,103.2 1425,113.2 1489,113.2 1496,120.2 1496,147 1484,159 1356,159 1345,170 1345,175.51 1344.81,175.7 1344.81,193.8 v1(1369.01,218) ; 1237.83,278.82 1237.83,283.83 1232.87,288.79 1215.21,288.79 1206.3,297.7 1206.3,340.7 1197.71,349.29 1180.6,349.29 1172.31,341 1172.31,324.31 1166,318 1121.51,318 1113.22,309.71 1113.22,275.22 1106,268 1083,268 1077.29,273.71 1077.29,341.2 1077,341.49 1077,365 1097.08,385.08 1190.08,385.08 1224.48,350.69 1239.31,350.69 v1(1255,335)
NetR135_1: R135.1 R246.1 U8.11 | length 358.6
  Bottom Layer w6.25: R246.1@156,1240 176,1260 176,1318.08 166,1328.08 166,1359 191.44,1384.44 191.44,1439.19 R135.1@170,1460.62
  Bottom Layer w8: R135.1@174,1461.62 174,1473 184,1483 206.65,1483 230.65,1507 U8.11@254.68,1507
NetR141_2: R141.2 U8.3 | length 79.8
  Bottom Layer w9: U8.3@380.66,1507 433.59,1507 R141.2@452.59,1526
NetR146_1: R146.1 U22.30 | length 73.9
  Top Layer w6.25: U22.30@653.61,851.5 688.56,851.5 R146.1@716.12,879.06
NetR149_1: R149.1 U1.G9 | length 823.4
  Top Layer w6.25: U1.G9@1205.49,351.5 v1(1221.5,335.49)
  Signal Layer 1 w4: v1(1221.5,335.49) 1233.02,335.49 1248.7,319.8 1314.96,319.8 1345.96,350.8 1491.41,350.8 1520.21,322 1520.21,311.79 1541,291 1541,250 1546,245 1579,245 1583,249 1583,267 1579,271 1558,271 1555,274 1555,310 1558,313 1577,313 1581,309 1581,285 1583,283 1613,283 1617.2,287.2 1617.2,356.8 1613,361 1597,361 1593.8,357.8 1593.8,334.8 1586,327 1560.99,327 v1(1551.99,336)
NetR150_1: R150.1 U1.F8 | length 1203.5
  Top Layer w6.25: U1.F8@1173.99,383 v1(1190.01,399.02)
  Signal Layer 1 w4: v1(1190.01,399.02) 1217.02,372 1237,372 1257.2,351.8 1330.8,351.8 1341,362 1495,362 1505.2,351.8 1572.8,351.8 v1(1580,359)
  Bottom Layer w6.25: R150.1@1466.99,312 1481.9,297.09 1527.91,297.09 1549,276 1549,82.46 1564.95,66.5 1642.62,66.5 1656,79.89 1656,227 1639.93,243.08 1584.93,243.08 1571,257 1571,292 1580,301 v1(1580,359)
NetR155_1: R155.1 U1.H10 | length 1188.5
  Top Layer w6.25: U1.H10@1236.98,320.01 1252.99,304 v1(1255,304)
  Signal Layer 1 w4: v1(1255,304) 1265,304 1270.7,298.3 1280.18,288.79 1333.21,288.79 1374,248 1468,248 1481,261 1481,290.25 1446.25,325 1396,325 1385,314 1385,291 1378,284 1359,284 1340,303 1340,326 1353.6,339.6 1456.4,339.6 1504,292 1515,292 1526,281 v1(1526,267)
  Bottom Layer w6.25: R155.1@1466.99,276 1466.99,250.99 1450,234 1450,102 1463,89 1514,89 1526,101 v1(1526,267)
NetR156_1: R156.1 U1.H9 | length 1207.1
  Top Layer w6.25: U1.H9@1205.49,320.01 v1(1221.5,303.99)
  Signal Layer 1 w4: v1(1221.5,303.99) 1234.01,303.99 1249.2,288.8 1258.19,288.8 1269.79,277.2 1322.8,277.2 1364.8,235.2 1578.8,235.2 1583,231 1583,206 1580,203 1534,203 1526.8,195.8 1526.8,173 1531.8,168 1581,168 1587,162 1587,140 1582,135 1534,135 1526.8,127.8 1526.8,104.06 1537.06,93.8 1567.9,93.8 1627,152.9 1627,413.14 1613.57,426.57 1606.09,426.57 1590.52,411 1563,411 1551.99,399.99 v1(1551.99,372)
NetR157_2: R157.2 U7.22 | length 69.2
  Top Layer w6.25: U7.22@827.94,2437.86 827.94,2482.94 v1(845,2500)
NetR158_2: R158.2 U7.23 | length 83.8
  Top Layer w6.25: U7.23@853.54,2437.86 853.54,2467.93 885.6,2500 v1(894,2500)
NetR160_2: R160.2 U7.12 | length 64.7
  Top Layer w6.25: R160.2@581,2728 597.63,2711.37 U7.12@597.63,2670.14
NetR161_2: R161.2 U22.27 | length 72.8
  Top Layer w6.25: U22.27@653.61,804.25 668.88,804.25 693.13,780 R161.2@716.38,780
NetR163_1: R163.1 U15.8 | length 197.8
  Top Layer w10: R163.1@304,1053 312,1061 316,1057 v1(373,1057)
  Bottom Layer w9: v1(373,1057) 385.32,1069.32 U15.8@385.32,1175.76
NetR167_2: R167.2 U28.1 | length 41.6
  Top Layer w6.25: R167.2@1351.99,1844 1352.68,1843.31 U28.1@1352.68,1802.64
NetR168_1: R168.1 U22.5 | length 330.6
  Top Layer w6.25: U22.5@574.87,867.24 v1@574.87,925
  Bottom Layer w6.25: v1(575,925) 575,884.42 588.24,871.18 670.27,871.18 690,890.91 690,943.12 R168.1@726.38,979.5
NetR169_1: R169.1 U1.J10 | length 1228.5
  Top Layer w6.25: U1.J10@1236.98,288.51 v1(1253,272.5)
  Signal Layer 2 w4: v1(1253,272.5) 1237.8,287.7 1184.7,287.7 1176.21,279.21 1176.21,266.78 1185.99,257 1195.5,257 1205.21,247.3 1205.21,172 1144.21,111 1143,111 1109.8,77.8 1068,77.8 1060.2,70 1060.2,40.36 1065.36,35.2 1234.2,35.2 1256,57 1283,57 1306,34 1465,34 1472,41 1472,64.6 1471.8,64.8 1481.8,74.8 1637.8,74.8 1696,133 1696,179 v1(1710.01,193)
NetR170_2: R170.2 U22.12 | length 201.5
  Top Layer w6.25: v1(444,836) 444.33,836.32 480.39,836.32 U22.12@480.39,835.75 U22.12@481.39,835.75
  Bottom Layer w6.25: v1(444,836) 442.67,834.68 442.67,790.58 459.17,774.08 517.95,774.08 530.62,761.42 R170.2@530.62,744
NetR171_2: R171.2 U22.29 | length 66
  Top Layer w6.25: U22.29@653.61,835.75 653.61,836.32 710.05,836.32 R171.2@716.38,830
NetR172_2: R172.2 U28.3 | length 44
  Top Layer w6.25: R172.2@1269.98,1802 1271.61,1803.62 U28.3@1313.31,1803.62
NetR173_1: R173.1 U23.3 | length 26.6
  Bottom Layer w7: U23.3@878.15,922.06 889,911.21 v3@889,900
  other v3: 890,899
NetR174_2: R174.2 U22.11 | length 184.2
  Top Layer w6.25: v1(379.29,742.59) 379.29,806.29 425.33,852.32 450.76,852.32 451.59,851.5 U22.11@480.39,851.5
NetR175_2: R175.2 U28.6 | length 38.8
  Top Layer w6.25: U28.6@1352.68,1780 1370.68,1762.01 R175.2@1384,1762.01
NetR179_2: R179.2 U22.3 | length 74.8
  Top Layer w6.25: U22.3@606.37,867.24 606.37,883.9 615,892.53 615,931.38 R179.2@610,936.38
NetR184_1: R184.1 U25.B1 | length 41.4
  Bottom Layer w8.5: U25.B1@824.75,1759.75 R184.1@865.75,1759.75
  Bottom Layer w9: R184.1@865.75,1759.75 R184.1@866,1760
NetR187_2: R187.2 U29.3 | length 45.1
  Top Layer w6.25: R187.2@1197,1806 1197,1827 1207.01,1837.01 U29.3@1217,1837.01
NetR189_1: R189.1 U1.J9 | length 1225.7
  Top Layer w6.25: U1.J9@1205.49,288.51 1205.49,286.51 v1(1220,272)
  Signal Layer 2 w4: v1(1220,272) 1233,272 1247.7,257.3 1268.3,257.3 1275,264 1275,284 1281,290 1306,290 1311.8,284.2 1311.8,246.2 1319,239 1332.42,239 1339,245.58 1339,296 1344,301 1356,301 1361,296 1361,247.5 1386,222.5 1386,175 1409.8,151.2 1423.2,151.2 1426,154 1426,176 1430,180 1444,180 1448,176 1448,154 1450.8,151.2 1556.2,151.2 1583,178 1583,301 1578,306 1562,306 1555,299 1555,222 1526,193 1406,193 1397,202 1397,244 1386,255 1386,288.02 v1(1362.02,312)
NetR191_2: R191.2 R247.1 U16.4 | length 114.3
  Top Layer w6.25: v1(731.62,1414.15) 779.47,1414.15 R247.1@784,1409.62 784,1465.38 R191.2@781,1468.38
NetR192_1: R192.1 U1.K11 | length 1150.4
  Top Layer w6.25: U1.K11@1268.48,257.02 v1(1284.5,241)
  Signal Layer 2 w4: v1(1284.5,241) 1297.95,241 1339,199.95 1339,167 1347.8,158.2 1385.64,158.2 1403.84,140 1559,140 1578.8,159.8 1603.8,159.8 1613,169 1613,194 1619,200 1647.01,200 1651,203.99 1651,221 1649,223 1616,223 1610,229 1610,238 1614,242 1648,242 1655,249 1655,266 1649.2,271.8 1596.2,271.8 1593,275 1593,287 1596,290 1602,290 1605,293 1605,304 1609,308 1617.2,308 1621,304.2 1621,285 1624,282 1633,282 1635.8,284.8 1635.8,328.69 1668.11,361 1724,361 1733.61,351.39 1733.61,180.59 v1(1710.02,157)
NetR193_1: R193.1 U1.L10 | length 1393.4
  Top Layer w6.25: U1.L10@1236.98,225.52 1279.06,183.44 v1(1279.06,181)
  Signal Layer 1 w4: v1(1279.06,181) 1279.06,133.57 1259.49,114 1216.82,114 1183.82,81 1000,81 972,53 972,34 987.63,18.37 1580.59,18.37 1678.79,116.58 1678.79,249.65 1694.14,265 v1(1710.01,265)
NetR194_1: R194.1 U1.K10 | length 1244.3
  Top Layer w6.25: U1.K10@1236.98,257.02 1253,241 v1(1255,241)
  Signal Layer 2 w4: v1(1255,241) 1262,234 1262,224 1268.8,217.2 1305.91,217.2 1316,207.11 1316,154 1323,147 1344,147 1349,142 1349,132 1345,128 1317.2,128 1315.2,126 1315.2,111.8 1320,107 1374,107 1380.2,113.2 1380.2,132.2 1383,135 1393,135 1399,129 1399,114 1402.4,110.6 1415,110.6 1417.4,113 1417.4,128 1419.6,130.2 1433.2,130.2 1436.4,127 1436.4,114 1439.8,110.6 1461.02,110.6 1476.42,126 1599,126 1603,130 1603,146 1607,150 1618,150 1623,145 1623,133 1629,127 1643,127 1651,135 1651,163 1646.79,167.21 1628.79,167.21 1625,171 1625,185.2 1630,190.2 1651.77,190.2 1666.6,205.03 1666.6,277.79 1662.79,281.6 1648,281.6 1645.6,284 1645.6,302.6 1649,306 1673,306 1686,319 1686,346 1691,351 1715.81,351 1723.81,343 1723.81,209.81 1721,207 1710,207 1703,214 1703,221.99 v1(1710.01,229)
NetR196_1: R196.1 U1.K9 | length 1243.1
  Top Layer w6.25: U1.K9@1205.49,257.02 v1(1221.5,241)
  Signal Layer 2 w4: v1(1221.5,241) 1237.2,225.3 1237.2,176.71 1228.3,167.81 1220,167.81 1191.64,139.45 1191.64,104.66 1182.45,95.47 1143.3,95.47 1114.44,66.6 1076,66.6 1071.4,62 1071.4,50.6 1075.6,46.4 1229.56,46.4 1251.36,68.2 1287.64,68.2 1310.64,45.2 1354.2,45.2 1361,52 1361,69 1369,77 1398,77 1405,70 1405,52.2 1412,45.2 1457,45.2 1462,50.2 1462,74 1472.6,84.6 1628.6,84.6 1682,138 1682,192.71 1693,203.71 1693,268 1710.01,285.01 v1(1710.01,301)
NetR197_1: R197.1 U1.J8 | length 1233.6
  Top Layer w6.25: U1.J8@1173.99,288.51 v1(1190.01,272.5)
  Signal Layer 2 w4: v1(1190.01,272.5) 1199.99,272.5 1216.28,256.2 1227.8,256.2 1239,245 1239,238.7 1240.34,237.36 1239,237.36 1249,227.36 1249,172.67 1232.94,156.61 1224.64,156.61 1202.84,134.81 1202.84,95.16 1207.4,90.6 1229.2,90.6 1234.6,96 1234.6,106.6 1241,113 1263,113 1269.2,106.8 1269.2,97 1274.2,92 1286,92 1290,96 1290,148.56 1282.78,155.78 1275.71,155.78 1268,163.49 1268,170.56 1263.86,174.7 1263.86,194.86 1270,201 1296,201 1304,193 1304,104 1312.2,95.8 1460.08,95.8 1476.08,111.8 1641.8,111.8 1664.97,134.97 1664.97,189.54 1676.4,200.97 1676.4,290.4 1710.01,324.01 v1(1710.01,337)
NetR198_1: R198.1 U1.G8 | length 1216.4
  Top Layer w6.25: U1.G8@1173.99,351.5 v1(1190.01,335.49)
  Signal Layer 2 w4: v1(1190.01,335.49) 1201.51,335.49 1217.2,319.8 1302.13,319.8 1309.53,327.2 1478.8,327.2 1485,321 1485,299 1480,294 1432,294 1426.8,288.8 1426.8,263.2 1429.9,260.1 1479.9,260.1 1485,255 1485,242 1481.42,238.42 1467.42,238.42 1460,231 1460,221 1455,216 1443,216 1436,223 1436,234 1431.58,238.42 1418.42,238.42 1410,230 1410,211 1415.8,205.2 1511.2,205.2 1544.2,238.2 1544.2,302.2 1572.8,330.8 1602.58,330.8 1654.62,382.85 1654.62,392.91 1621.71,425.83 1610.31,425.83 1578,393.52 v1(1578,391)
  Bottom Layer w6.25: R198.1@1490.41,415.58 1514.99,391 v1(1578,391)
NetR199_1: R199.1 U1.J6 | length 1408.1
  Top Layer w6.25: U1.J6@1111,288.51 v1(1127.02,272.5)
  Signal Layer 1 w4: v1(1127.02,272.5) 1140.82,286.3 1195.72,286.3 1206.2,275.82 1206.2,266.28 1217.68,254.8 1227.22,254.8 1241.2,240.82 1241.2,223.18 1245.1,219.28 1245.1,218.9 1267.8,196.2 1285.36,196.2 1294.26,187.3 1294.26,90.26 1276.12,72.12 1238.41,72.12 1232.19,65.9 1232.19,58.89 1238.08,53 1353.28,53 1359.08,47.2 1495.71,47.2 1496.03,47.52 1496.35,47.2 1549.91,47.2 1650.63,147.92 1650.63,451.15 1724.68,525.21 1724.68,606.93 v1(1707.62,624)
NetR216_1: R216.1 U1.K2 | length 1344.7
  Top Layer w6.25: v1(969,241) U1.K2@985.02,257.02
  Signal Layer 1 w4: v1(990,41) 995,36 1573.75,36 1662.99,125.25 1662.99,398.99 1692,428 1692,453 1720,481 v1(1735.99,481)
  Bottom Layer w6.25: v1(969,241) 983.92,226.07 983.92,151.92 976.67,144.67 976.67,109.33 990,96 v1(990,41)
NetR217_1: R217.1 U1.J4 | length 1118.5
  Top Layer w6.25: v1(1031.99,272.5) U1.J4@1048.01,288.51
  Signal Layer 2 w4: v1(1031.99,272.5) 1031.99,284.48 1045.79,298.28 1045.79,314.79 1052.69,321.69 1072.37,321.69 1082,331.32 1082,341 1095,354 1254,354 1257.31,350.69 1468.69,350.69 1476,358 1476,370 1481,375 1494,375 1499,370 1499,356.69 1505,350.69 1550.2,350.69 1568,368.49 1568,381.48 1561,388.48 1561,401 v1(1585,425)
  Bottom Layer w6.25: v1(1585,425) 1629,425 1637,417 1696,417 1713,434 1713,527 1698.93,541.07 1678.07,541.07 1662.03,525.03 1662.03,457.03 1653.66,448.66 R217.1@1637.65,448.66
NetR218_1: R218.1 U1.K1 | length 1459
  Top Layer w6.25: v1(937.5,241) U1.K1@953.52,257.02
  Signal Layer 1 w4: v1(937.5,241) 937.5,252.61 884.4,305.71 884.4,572.32 961.48,649.41 1034.81,649.41 1053.2,667.79 1075,667.79 1096.28,646.51 1135.05,646.51 1142.94,654.4 1369.31,654.4 1428.89,713.98 1481.3,713.98 1493.52,726.2 1539.4,726.2 1625.6,640 1656,640 1663.14,647.14 1703.99,647.14 1735.99,615.14 v1(1735.99,517)
NetR219_1: R219.1 U1.J2 | length 1284.2
  Top Layer w6.25: v1(969,272.5) U1.J2@985.02,288.51
  Signal Layer 1 w4: v1(969,272.5) 959.5,272.5 943,289 932.79,289 907.36,314.43 907.36,562.25 970.11,625 1050.34,625 1056.75,618.59 1145.59,618.59 1159,632 1257.98,632 1287.18,602.8 1378.3,602.8 1456.94,681.43 1541.57,681.43 1547.8,675.2 1670,553 v1(1710.01,553)